# EAGLE board Lighting Schematic Board (EAGLE 9.1.3)
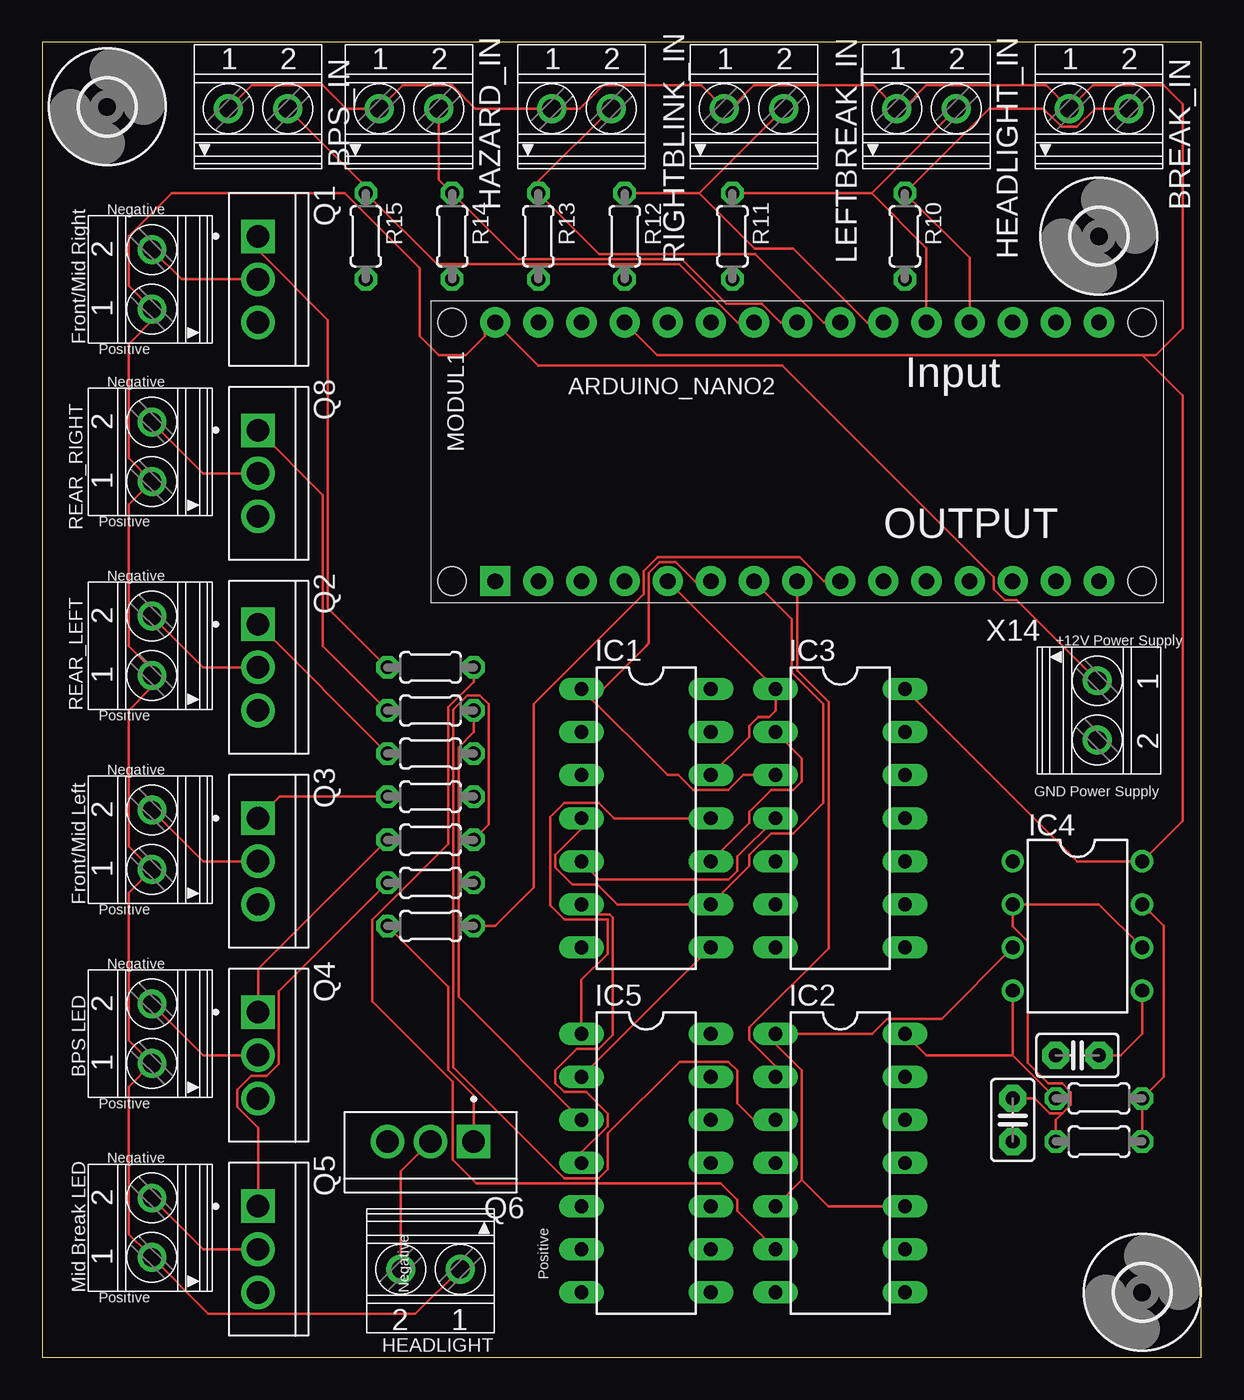
[diagram p0: board, top side]
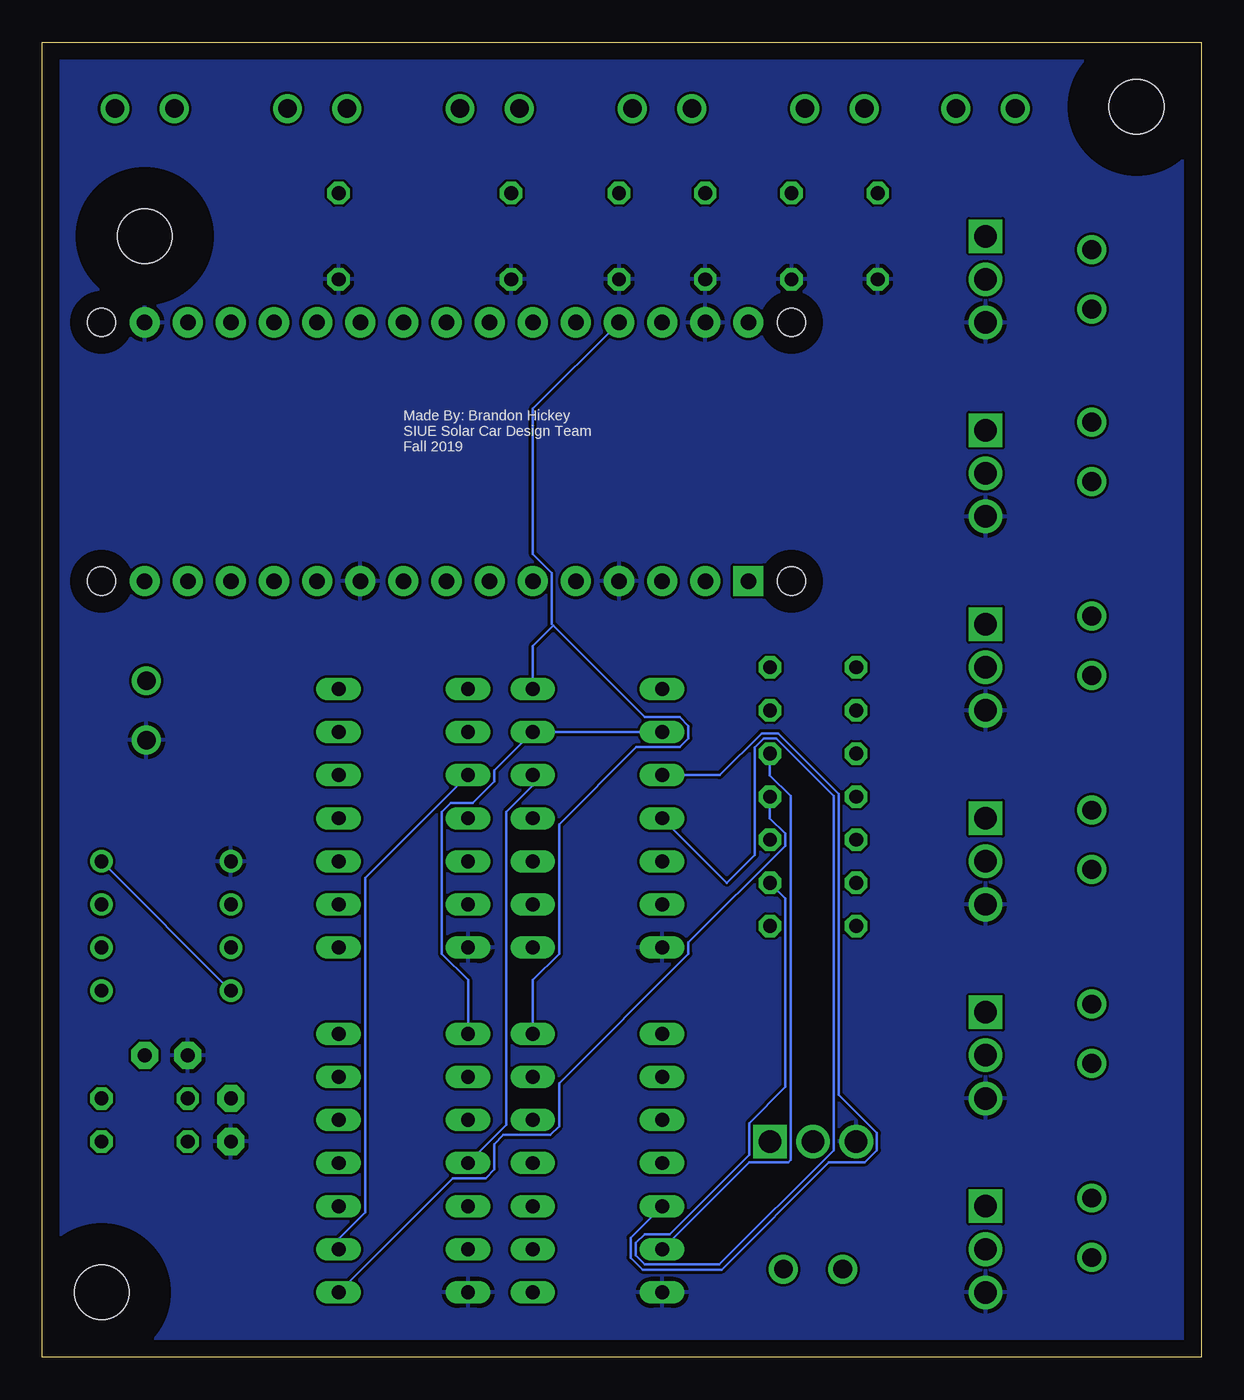
[diagram p1: board, bottom side, seen from below]

Size 68.25 x 77.46 mm. Coordinates in mm from the lower left corner, seen from the top.
Outline: 0,0 68.25,0 68.25,77.46 0,77.46 0,0
Copper layers (1*16): Top 0.035mm / dielectric 1.5mm / Bottom 0.035mm
Design rules "default": minimum track width 6mil, minimum drill 0.35mm, track to track 6mil, track to pad 6mil, pad to pad 6mil, via to via 6mil, smd to smd 6mil, copper to edge 40mil, drill to drill 6mil, minimum pad ring 10mil, minimum via ring 8mil, stop-mask expansion 4mil, vias tented up to drill 0mil, thermal gap 10mil

## Footprints (pad centres in the part's own frame; a part is rotated, then mirrored left to right if it is on the bottom)
1751248 = drill 1.1 pad 1.7: 1 -1.75,-0.1; 2 1.75,-0.1
C2.5-2 = drill 0.813 pad 1.6 octagon: 1 -1.27,0; 2 1.27,0
DIL14 = drill 0.813 long: 1 -7.62,-3.81; 2 -5.08,-3.81; 3 -2.54,-3.81; 4 0,-3.81; 5 2.54,-3.81; 6 5.08,-3.81; 7 7.62,-3.81; 8 7.62,3.81; 9 5.08,3.81; 10 2.54,3.81; 11 0,3.81; 12 -2.54,3.81; 13 -5.08,3.81; 14 -7.62,3.81
DIL08 = drill 0.813 pad 1.27: 1 -3.81,-3.81; 2 -1.27,-3.81; 3 1.27,-3.81; 4 3.81,-3.81; 5 3.81,3.81; 6 1.27,3.81; 7 -1.27,3.81; 8 -3.81,3.81
ARDUINO_NANO2 = drill 0.914 pad 1.778 square: J1.1 -7.62,17.78 | drill 0.914 pad 1.778: J1.2 -7.62,15.24; J1.3 -7.62,12.7; J1.4 -7.62,10.16; J1.5 -7.62,7.62; J1.6 -7.62,5.08; J1.7 -7.62,2.54; J1.8 -7.62,0; J1.9 -7.62,-2.54; J1.10 -7.62,-5.08; J1.11 -7.62,-7.62; J1.12 -7.62,-10.16; J1.13 -7.62,-12.7; J1.14 -7.62,-15.24; J1.15 -7.62,-17.78; J2.1 7.62,17.78; J2.2 7.62,15.24; J2.3 7.62,12.7; J2.4 7.62,10.16; J2.5 7.62,7.62; J2.6 7.62,5.08; J2.7 7.62,2.54; J2.8 7.62,0; J2.9 7.62,-2.54; J2.10 7.62,-5.08; J2.11 7.62,-7.62; J2.12 7.62,-10.16; J2.13 7.62,-12.7; J2.14 7.62,-15.24; J2.15 7.62,-17.78 | hole 1.651: -7.62,-20.32; 7.62,-20.32; 7.62,20.32; -7.62,20.32
TRANS_RFP30N06LE = drill 1.32 square: 1 -2.54,0 | drill 1.32: 2 0,0; 3 2.54,0
0204/5 = drill 0.813 octagon: 1 -2.54,0; 2 2.54,0
3,2 = hole 3.2: 0,0

## Placement (x,y rotation side)
BPS  1751248  [1751248]  6.35,19.05 90 top
BPS_IN  1751248  [1751248]  12.7,73.66 0 top
BREAK_IN  1751248  [1751248]  62.23,73.66 0 top
C1  470nF  [C2.5-2]  57.15,13.97 270 top
C2  10nF  [C2.5-2]  60.96,17.78 0 top
FRONT/MID_LEFT  1751248  [1751248]  6.35,30.48 90 top
FRONT/MID_RIGHT  1751248  [1751248]  6.35,63.5 90 top
HAZARD_IN  1751248  [1751248]  21.59,73.66 0 top
HEADLIGHT  1751248  [1751248]  22.86,5.08 180 top
HEADLIGHT_IN  1751248  [1751248]  52.07,73.66 0 top
IC1  74HC08N  [DIL14]  35.56,31.75 270 top
IC2  74HC08N  [DIL14]  46.99,11.43 270 top
IC3  74LS04N  [DIL14]  46.99,31.75 270 top
IC4  NE555N  [DIL08]  60.96,25.4 270 top
IC5  74HC32N  [DIL14]  35.56,11.43 270 top
LEFTBREAK_IN  1751248  [1751248]  41.91,73.66 0 top
MID_BREAK  1751248  [1751248]  6.35,7.62 90 top
MODUL1  ARDUINO_NANO2  [ARDUINO_NANO2]  44.45,53.34 90 top
Q1  RFP30N06LE  [TRANS_RFP30N06LE]  12.7,63.5 270 top
Q2  RFP30N06LE  [TRANS_RFP30N06LE]  12.7,40.64 270 top
Q3  RFP30N06LE  [TRANS_RFP30N06LE]  12.7,29.21 270 top
Q4  RFP30N06LE  [TRANS_RFP30N06LE]  12.7,17.78 270 top
Q5  RFP30N06LE  [TRANS_RFP30N06LE]  12.7,6.35 270 top
Q6  RFP30N06LE  [TRANS_RFP30N06LE]  22.86,12.7 180 top
Q8  RFP30N06LE  [TRANS_RFP30N06LE]  12.7,52.07 270 top
R1  2k  [0204/5]  22.86,40.64 180 top
R2  2k  [0204/5]  22.86,38.1 180 top
R3  2k  [0204/5]  22.86,33.02 180 top
R4  2k  [0204/5]  22.86,35.56 180 top
R5  2k  [0204/5]  22.86,30.48 180 top
R6  2k  [0204/5]  22.86,27.94 180 top
R7  2k  [0204/5]  22.86,25.4 180 top
R8  1M  [0204/5]  62.23,12.7 0 top
R9  10k  [0204/5]  62.23,15.24 180 top
R10  10k  [0204/5]  50.8,66.04 270 top
R11  10k  [0204/5]  40.64,66.04 270 top
R12  10k  [0204/5]  34.29,66.04 270 top
R13  10k  [0204/5]  29.21,66.04 270 top
R14  10k  [0204/5]  24.13,66.04 270 top
R15  10k  [0204/5]  19.05,66.04 270 top
REAR_LEFT  1751248  [1751248]  6.35,41.91 90 top
REAR_RIGHT  1751248  [1751248]  6.35,53.34 90 top
RIGHTBLINK_IN  1751248  [1751248]  31.75,73.66 0 top
U$1  [3,2]  3.81,73.66 0 top
U$2  [3,2]  62.23,66.04 0 top
U$3  [3,2]  64.77,3.81 0 top
X14  1751248  [1751248]  62.23,38.1 270 top

## Library data of the parts
BPS BPS_IN BREAK_IN FRONT/MID_LEFT FRONT/MID_RIGHT HAZARD_IN HEADLIGHT HEADLIGHT_IN LEFTBREAK_IN MID_BREAK REAR_LEFT REAR_RIGHT RIGHTBLINK_IN X14 = con-phoenix-350; OC_FARNELL: unknown; OC_NEWARK: unknown
C1 C2 = capacitor-wima
IC1-IC3 IC5 = 74xx-eu
IC4 = linear
MODUL1 = arduino; ANZAHL: 2; MODUL: TRUE; STECKX0: -76200; STECKX1: 76200; STECKY0: 177800; STECKY1: 177800
Q1-Q6 Q8 = RFP30N06LE; AVAILABILITY: Unavailable; DESCRIPTION: MOSFET N-CH 60V 30A TO-220AB; MF: ON Semiconductor; MP: RFP30N06LE; PACKAGE: TO-220 Intersil; PRICE: None
R1-R15 = rcl; SPICEPREFIX: R
U$1-U$3 = holes

## Nets
2_6: C1.1 IC4.2 IC4.6 R8.1
+12V: BPS.1 FRONT/MID_LEFT.1 FRONT/MID_RIGHT.1 HEADLIGHT.1 MID_BREAK.1 MODUL1.J2.1 REAR_LEFT.1 REAR_RIGHT.1 X14.1
BPS: IC2.2 MODUL1.J1.8
BPS_IN: BPS_IN.2 MODUL1.J2.7 R15.1
BPS_LED: BPS.2 Q4.2
BREAK: IC1.4 IC1.9 MODUL1.J1.7 R6.1
BREAK_IN: BREAK_IN.2 MODUL1.J2.12 R10.1
CLK: IC1.2 IC1.13 IC2.1 IC2.5 IC2.10 IC4.3
GND: C1.2 C2.1 IC1.7 IC2.7 IC3.7 IC4.1 IC5.7 MODUL1.J1.4 MODUL1.J1.10 MODUL1.J2.2 MODUL1.J2.15 Q1.3 Q2.3 Q3.3 Q4.3 Q5.3 Q6.3 Q8.3 R10.2 R11.2 R12.2 R13.2 R14.2 R15.2 X14.2
HAZARD_IN: HAZARD_IN.2 MODUL1.J2.8 R14.1
HEADLIGHT: MODUL1.J1.9 R7.1
HEADLIGHT_IN: HEADLIGHT_IN.2 MODUL1.J2.11 R11.1
HEADLIGHT_LED: HEADLIGHT.2 Q6.2
LEFTBLINK: IC1.1 IC2.9 IC3.3 MODUL1.J1.6
LEFTBLINK_IN: LEFTBREAK_IN.2 MODUL1.J2.10 R12.1
MID_BREAK_LED: MID_BREAK.2 Q5.2
MID_FRONT_LEFT_LED: FRONT/MID_LEFT.2 Q3.2
MID_FRONT_RIGHT_LED: FRONT/MID_RIGHT.2 Q1.2
N$1: Q8.1 R2.2
N$2: IC1.10 IC3.2
N$3: IC2.6 R1.1
N$4: IC1.5 IC3.4
N$5: IC4.7 R8.2 R9.1
N$6: Q2.1 R4.2
N$7: Q1.1 R1.2
N$8: Q3.1 R3.2
N$9: Q4.1 R5.2
N$10: IC2.3 R5.1
N$11: Q5.1 R6.2
N$12: Q6.1 R7.2
N$13: IC2.8 R3.1
N$17: IC5.3 R2.1
N$18: IC1.8 IC5.2
N$19: IC1.11 IC5.1
N$20: IC5.6 R4.1
N$21: IC1.6 IC5.4
N$22: IC1.3 IC5.5
N$28: MODUL1.J1.15
N$29: MODUL1.J1.14
N$30: MODUL1.J1.13
N$31: MODUL1.J1.12
N$32: MODUL1.J1.11
N$34: C2.2 IC4.5
N$39: MODUL1.J1.2
N$40: MODUL1.J1.1
N$41: MODUL1.J2.5
N$42: MODUL1.J2.6
N$51: MODUL1.J2.14
N$52: MODUL1.J2.13
REAR_LEFT_LED: Q2.2 REAR_LEFT.2
REAR_RIGHT_LED: Q8.2 REAR_RIGHT.2
RIGHTBLINK: IC1.12 IC2.4 IC3.1 MODUL1.J1.5
RIGHTBLINK_IN: MODUL1.J2.9 R13.1 RIGHTBLINK_IN.2
VCC: BPS_IN.1 BREAK_IN.1 HAZARD_IN.1 HEADLIGHT_IN.1 IC1.14 IC2.14 IC3.14 IC4.4 IC4.8 IC5.14 LEFTBREAK_IN.1 MODUL1.J2.4 R9.2 RIGHTBLINK_IN.1

## Tracks (layer width: path | path; a pad name or v marks a point on that pad's centre or on a via)
2_6
  Top 0.152: IC4.6 62.23,26.67 IC4.2 57.15,25.39 58.04,24.5 58.04,17.32 59.23,16.13 59.69,16.13 | 60.06,16.13 60.58,15.61 | 60.58,15.61 60.58,14.87 | 60.58,14.87 60.06,14.35 | 60.06,14.35 59.32,14.35 58.43,15.24 C1.1 | 59.69,16.13 60.06,16.13 | 60.06,14.35 60.58,14.87 | 60.58,14.87 60.58,15.61 | 60.58,15.61 60.06,16.13 | 60.06,16.13 59.69,16.13 | R8.1 59.69,13.98 60.06,14.35
+12V
  Top 0.152: X14.1 57.38,44.6 56.69,44.6 56.03,45.26 56.03,45.95 43.56,58.42 29.21,58.42 MODUL1.J2.1 26.05,60.34 26.05,60.17 24.92,59.04 23.34,59.04 22.21,60.17 22.21,64.16 17.79,68.58 7.62,68.58 5.08,66.04 5.08,63.12 FRONT/MID_RIGHT.1 6.45,61.06 5.08,59.69 5.08,52.96 REAR_RIGHT.1 5.08,50.22 5.08,41.91 6.45,40.54 REAR_LEFT.1 6.45,39.47 5.08,38.1 5.08,30.1 FRONT/MID_LEFT.1 5.08,27.36 5.08,18.67 BPS.1 5.08,15.93 5.08,7.24 6.16,6.16 | 6.16,6.16 MID_BREAK.1 | HEADLIGHT.1 21.97,2.54 9.78,2.54 6.16,6.16
BPS
  Top 0.152: MODUL1.J1.8 44.45,40.45 46.3,38.59 46.3,24.09 41.63,19.42 41.63,18.68 43.18,17.13 IC2.2
BPS_IN
  Top 0.152: BPS_IN.2 19.05,68.96 R15.1 23.24,64.39 37.52,64.39 40.95,60.96 MODUL1.J2.7
BPS_LED
  Top 0.152: Q4.2 9.47,17.78 BPS.2
BREAK
  Top 0.152: MODUL1.J1.7 44.15,43.48 44.15,40.32 46,38.47 46,32.65 44.21,30.86 42.91,30.86 41.63,29.58 41.63,28.93 IC1.9 33.86,26.67 32.68,27.85 31.19,27.85 30.2,28.84 30.2,29.58 31.75,31.13 IC1.4
  Bottom 0.152: IC1.4 27.94,27.94 26.29,29.59 26.29,35.93 25.77,36.45 25.03,36.45 21.64,33.06 21.64,12.2 28.38,5.46 32.78,5.46 33.3,5.98 33.3,6.72 32.78,7.24 31.29,7.24 26.62,11.91 26.62,13.79 24.49,15.92 24.49,27.03 R6.1
BREAK_IN
  Top 0.152: BREAK_IN.2 62.01,73.56 60.93,72.48 60.03,72.48 58.95,73.56 55.78,73.56 R10.1 54.61,64.77 MODUL1.J2.12
CLK
  Top 0.152: IC4.3 52.96,19.94 49.77,19.94 48.88,19.05 IC2.1 43.18,18.43 44.73,16.88 44.73,10.44 | 44.73,10.44 IC2.5 | IC2.10 46.28,8.89 44.73,10.44
  Bottom 0.152: IC1.2 IC1.13 41.63,34.57 41.63,33.92 42.91,32.64 44.21,32.64 44.73,32.12 44.73,23.76 43.18,22.21 IC2.1
GND
  pour Bottom: 0,77.47 68.58,77.47 68.58,0 0,0
HAZARD_IN
  Top 0.152: HAZARD_IN.2 23.34,69.37 R14.1 28.02,64.69 37.65,64.69 40.26,62.08 42.37,62.08 43.49,60.96 MODUL1.J2.8
HEADLIGHT
  Top 0.152: R7.1 26.67,25.4 28.93,27.66 28.93,38.47 35.41,44.95 35.41,46.31 36.24,47.14 44.61,47.14 46.03,45.72 MODUL1.J1.9
HEADLIGHT_IN
  Top 0.152: HEADLIGHT_IN.2 48.84,68.58 | 48.84,68.58 R11.1 | 48.84,68.58 52.07,65.35 MODUL1.J2.11
HEADLIGHT_LED
  Top 0.152: HEADLIGHT.2 21.11,10.95 Q6.2
LEFTBLINK
  Top 0.152: MODUL1.J1.6 38.41,45.72 37.29,46.84 36.37,46.84 35.71,46.18 35.71,42.06 35.56,41.91 33.02,39.37 IC1.1 36.83,34.29 37.45,34.29 38.34,33.4 40.4,33.4 41.29,34.29 IC3.3
  Bottom 0.152: IC2.9 50.8,6.97 49.25,8.52 49.25,28.22 IC3.3
LEFTBLINK_IN
  Top 0.152: LEFTBREAK_IN.2 38.68,68.58 | 38.68,68.58 R12.1 | 38.68,68.58 41.96,65.3 44.23,65.3 48.57,60.96 MODUL1.J2.10
MID_BREAK_LED
  Top 0.152: Q5.2 9.47,6.35 MID_BREAK.2
MID_FRONT_LEFT_LED
  Top 0.152: Q3.2 9.47,29.21 FRONT/MID_LEFT.2
MID_FRONT_RIGHT_LED
  Top 0.152: Q1.2 8.2,63.5 FRONT/MID_RIGHT.2
N$1
  Top 0.152: Q8.1 16.51,50.8 16.51,41.91 R2.2
N$2
  Top 0.152: IC1.10 41.63,31.47 41.63,32.12 42.91,33.4 44.21,33.4 44.73,33.92 44.73,35.28 IC3.2
N$3
  Top 0.152: IC2.6 40.92,8.61 40.92,9.26 39.94,10.24 25.56,10.24 24.18,11.62 24.18,16.22 19.43,20.97 19.43,25.77 23.9,30.24 23.9,38.29 25.4,39.79 R1.1
N$4
  Top 0.152: IC3.4 40.92,29.49 40.92,28.65 40.42,28.16 32.8,28.16 IC1.5
N$5
  Top 0.152: R8.2 R9.1 66.04,16.51 66.04,25.4 IC4.7
N$6
  Top 0.152: Q2.1 R4.2
N$7
  Top 0.152: R1.2 16.82,44.15 16.82,61.11 12.7,65.22 Q1.1
N$8
  Top 0.152: Q3.1 13.97,33.02 R3.2
N$9
  Top 0.152: Q4.1 12.7,22.86 R5.2
N$10
  Top 0.152: IC2.3 41.91,13.97 40.92,14.96 40.92,16.88 40.4,17.4 37.53,17.4 33.3,13.17 33.3,11.06 32.78,10.54 30.72,10.54 24.21,17.06 24.21,38.16 25.03,38.99 25.77,38.99 26.29,38.47 26.29,31.37 R5.1
N$11
  Top 0.152: Q5.1 12.7,13.52 11.48,14.73 11.48,15.74 12.3,16.56 13.21,16.56 13.92,17.27 13.92,21.54 R6.2
N$12
  Top 0.152: Q6.1 25.4,15.43 23.9,16.93 23.9,21.82 R7.2
N$13
  Bottom 0.152: IC2.8 44.07,10.54 42.15,10.54 41.63,11.06 41.63,12.55 41.1,13.08 38.34,13.08 37.82,13.6 37.82,16.14 30.2,23.76 30.2,24.42 24.51,30.11 24.51,30.85 25.4,31.74 R3.1
N$17
  Top 0.152: R2.1 25.4,36.82 24.51,35.93 24.51,21.21 IC5.3
N$18
  Top 0.152: IC5.2 IC1.8
N$19
  Top 0.152: IC5.1 31.75,22.21 33.3,23.76 33.3,25.78 30.72,25.78 29.9,26.61 29.9,31.81 30.72,32.64 32.78,32.64 33.67,31.75 IC1.11
N$20
  Bottom 0.152: R4.1 25.4,34.28 24.18,33.06 24.18,11.62 24.32,11.48 26.62,11.48 IC5.6
N$21
  Top 0.152: IC5.4 31.75,12.05 33.3,13.6 33.3,14.34 32.02,15.62 30.72,15.62 30.2,16.14 30.2,16.88 31.48,18.16 32.78,18.16 33.6,18.99 33.6,25.91 33.43,26.09 32.33,26.09 IC1.6
N$22
  Bottom 0.152: IC1.3 28.36,34.29 25.89,36.75 24.91,36.75 21.34,33.19 21.34,15.44 19.1,13.21 19.1,12.2 19.82,11.48 21.92,11.48 28.25,5.16 32.91,5.16 33.6,5.86 33.6,7.04 IC5.5
N$34
  Top 0.152: IC4.5 64.77,19.05 63.5,17.78 C2.2
REAR_LEFT_LED
  Top 0.152: Q2.2 9.47,40.64 REAR_LEFT.2
REAR_RIGHT_LED
  Top 0.152: Q8.2 9.47,52.07 REAR_RIGHT.2
RIGHTBLINK
  Top 0.152: MODUL1.J1.5 IC3.1 43.18,38.1 42.8,37.72 42.15,37.72 41.63,37.2 41.63,36.55 IC1.12
  Bottom 0.152: IC2.4 40.92,13.69 40.92,32.12 39.37,33.67 IC1.12
RIGHTBLINK_IN
  Top 0.152: RIGHTBLINK_IN.2 29.21,69.27 R13.1 32.79,65 41.99,65 46.03,60.96 MODUL1.J2.9
VCC
  Top 0.152: BPS_IN.1 12.32,74.93 16.51,74.93 17.88,73.56 HAZARD_IN.1 21.21,74.93 24.13,74.93 25.5,73.56 RIGHTBLINK_IN.1 31.65,73.56 33.02,74.93 38.79,74.93 LEFTBREAK_IN.1 40.54,73.56 41.91,74.93 48.95,74.93 HEADLIGHT_IN.1 50.7,73.56 52.07,74.93 59.11,74.93 BREAK_IN.1 61.85,74.93 66.04,74.93 67.16,73.81 67.16,60.64 65.56,59.04 64.77,59.04 | MODUL1.J2.4 36.21,59.04 64.77,59.04 | 64.77,59.04 67.16,56.65 67.16,31.75 67.16,31.6 IC4.8 60.96,29.21 IC3.14 | R9.2 57.15,17.78 | 57.15,17.78 IC4.4 | IC2.14 52.07,17.78 57.15,17.78
  Bottom 0.152: MODUL1.J2.4 39.37,55.88 39.37,47.3 38.25,46.18 38.25,43.19 38.17,43.11 | IC5.14 39.37,22.21 37.82,23.76 37.82,31.38 33.26,35.94 30.72,35.94 30.2,36.46 30.2,37.2 30.72,37.72 32.78,37.72 38.17,43.11 | IC1.14 39.37,41.91 38.17,43.11 | IC4.4 IC4.8

## Text on the board
tNames: Negative | Front/Mid Right | Positive | Negative | Input | Positive | OUTPUT | Negative | +12V Power Supply | Positive | Negative | GND Power Supply | Front/Mid Left | Positive | Negative | BPS LED | Positive | Negative | Positive | Mid Break LED | Positive | Negative
bNames: Made By: Brandon Hickey / SIUE Solar Car Design Team / Fall 2019